# Altium PCB CANLink_V2.PcbDoc (part 3 of 3)
Units mm, origin at the board's own origin, x right, y up, seen from the top; angles counter-clockwise.
Board outline 75 x 56 mm, 2 copper layers (Top Layer, Bottom Layer); 205 components, 140 nets, 648 pads, 309 vias.
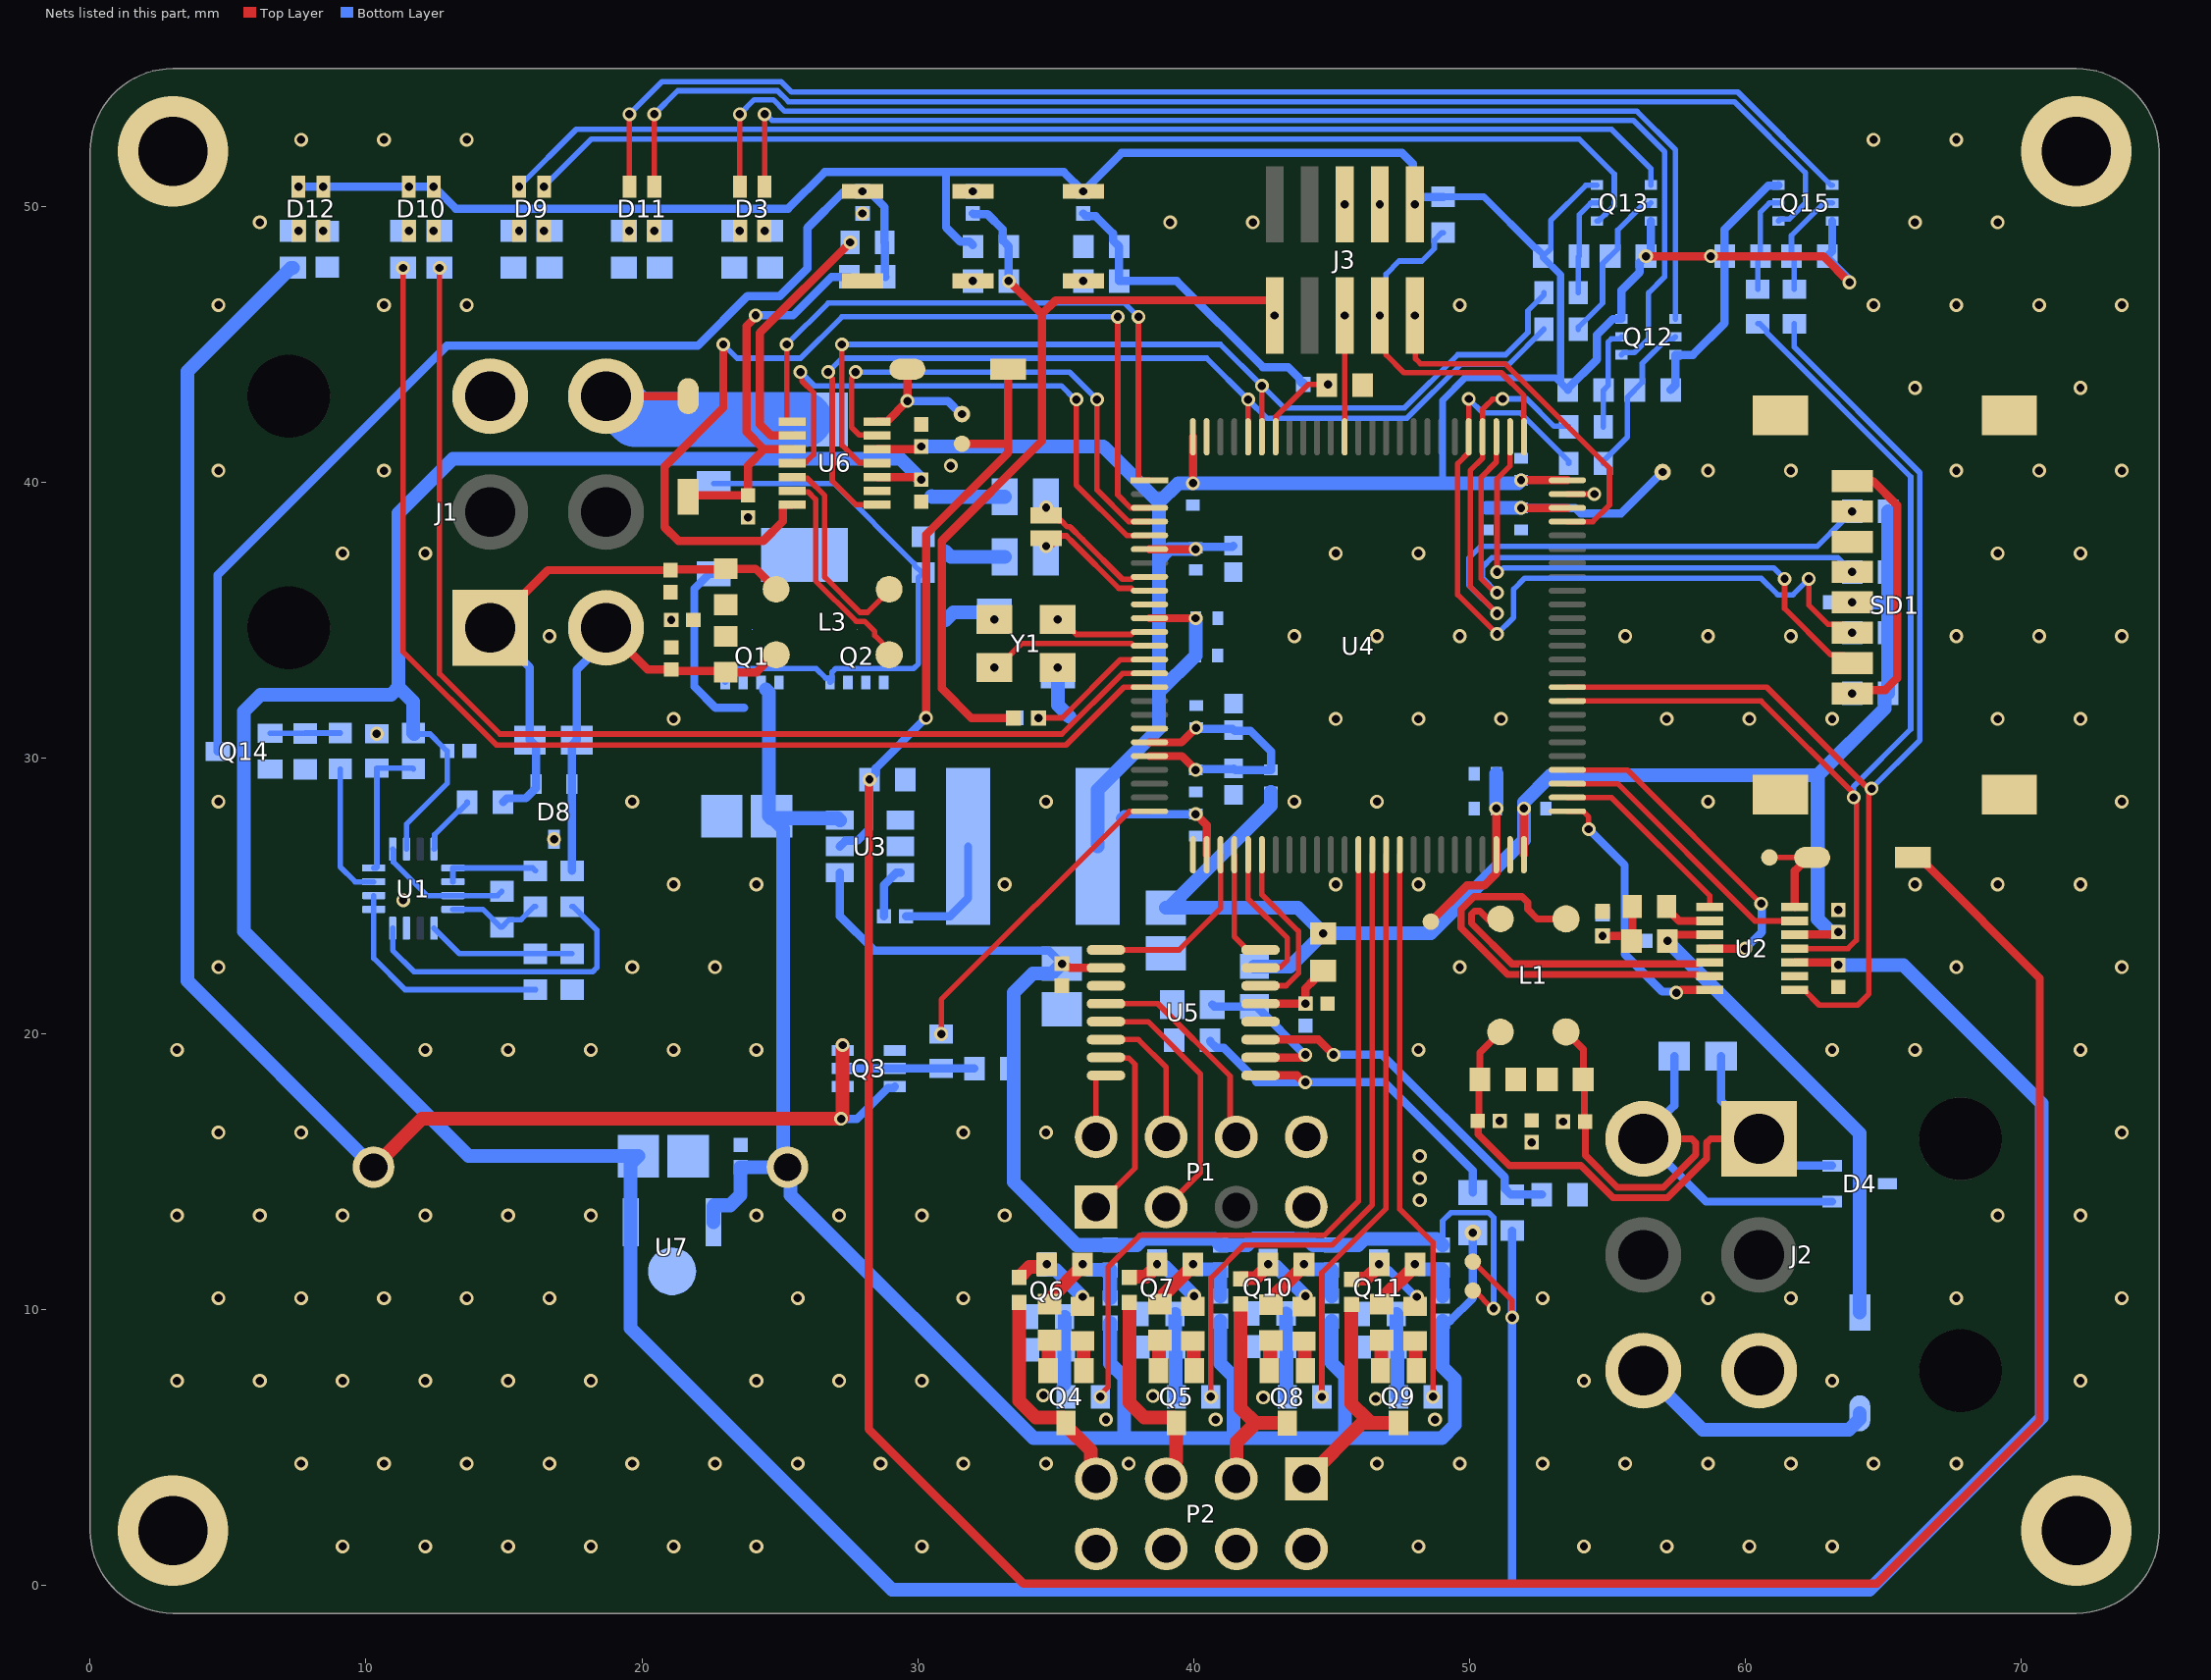
[diagram p2: the nets of this part, all layers, seen from the top]

## Via types
v1: diameter 0.5, hole 0.3, Top Layer to Bottom Layer, tented both sides, 305 vias
v2: diameter 4, hole 2.5, Top Layer to Bottom Layer, 4 vias

## Nets (pads, with @x,y where several pads share a name; then routed paths per layer and width w, separated by ;. In a path a pad name is that pad's centre, name@x,y a point inside that pad or via, vN(x,y) a via of type N, cw(c..) or ccw(c..) an arc to the next point about the centre after c; other vN are vias at no path point)
5V: C4.2 C19.2 C40.2 C48.1 R30.2 R88.2 TP5.1 U1.2 U2.3 U6.3 U7.1 | length 169.3
  Top Layer w0.2: TP5.1@50.125,11.75 51.55,10.325 v1(51.55,9.725)
  Top Layer w0.3: U6.3@28.533,40.196 28.535,40.193 30.032,40.193 v1(30.125,40.1) ; U2.3@61.793,22.6 61.796,22.598 63.277,22.598 v1(63.375,22.5)
  Bottom Layer w0.2: U1.2@11.465,26.705 11.465,27.61 12.94,29.085 C48.1@12.94,30.26 12.78,30.42 12.323,30.877 R88.2@11.748,30.877
  Bottom Layer w0.3: 51.55,-0.15 v1(51.55,9.725) R30.2@51.55,12.875
  Bottom Layer w0.5: R88.2@11.748,30.877 R88.2@11.715,30.91 11.7,30.925 11.7,32.05 11.175,32.575 ; v1(30.125,40.1) 29.375,40.85 13.15,40.85 11.175,38.875 11.175,32.575 ; v1(63.375,22.5) 65.725,22.5 70.75,17.475 70.75,6.1 64.5,-0.15 51.55,-0.15 29.075,-0.15 19.593,9.332 U7.1@19.593,13.176 19.593,15.293 C40.2@19.875,15.575 13.725,15.575 5.575,23.725 5.575,31.7 6.175,32.3 10.9,32.3 11.175,32.575
AN_IO_0: P1.6 U5.4 | length 7.9
  Top Layer w0.2: U5.4@36.825,21.1 38.7,21.1 41.325,18.475 41.325,16.49 P1.6@41.545,16.27
AN_IO_1: P1.3 U5.5 | length 9.5
  Top Layer w0.2: U5.5@36.825,20.45 38.35,20.45 40.25,18.55 40.25,14.975 P1.3@39.005,13.73
AN_IO_2: P1.4 U5.6 | length 5.1
  Top Layer w0.2: U5.6@36.825,19.8 38,19.8 39.005,18.795 P1.4@39.005,16.27
AN_IO_3: P1.1 U5.7 | length 6.9
  Top Layer w0.2: P1.1@36.465,13.73 37.875,15.14 37.875,18.9 37.654,19.121 36.854,19.121 U5.7@36.825,19.15
AN_IO_4: P1.2 U5.8 | length 2.5
  Top Layer w0.2: P1.2@36.465,16.27 36.465,18.431 36.534,18.5 U5.8@36.825,18.5
BOOT: C44.1 R22.2 R44.1 R47.2 | length 11.5
  Bottom Layer w0.3: C44.1@36,49.75 36.103,49.647 36.453,49.647 37.075,49.025 37.075,48.775 R47.2@37.3,48.55 R44.1@37.3,47.3 39.389,47.3 42.514,44.175 43.425,44.175 43.85,43.75 43.85,43.675 43.918,43.607 R22.2@43.993,43.607
BUZZ: R39.1 U4.25 | length 11.6
  Top Layer w0.2: v1(30.85,20) 30.85,21.25 37.673,28.073 38.397,28.073 U4.25@38.4,28.075
BUZZ_NEG: LS1.N Q3.3 Q3.6 R49.1 | length 59.8
  Top Layer w0.5: LS1.N@10.275,15.175 12.025,16.925 v1(27.225,16.925) 27.275,16.975 v1(27.275,19.6)
  Bottom Layer w0.3: v1(27.225,16.925) 27.8,16.925 28.925,18.05 29.125,18.05 Q3.3@29.175,18.1
  Bottom Layer w0.5: R49.1@7.35,47.775 7.275,47.775 3.525,44.025 3.525,21.925 LS1.N@10.275,15.175
CAN0_INH: D1.2 TP1.1 U6.7 | length 4.7
  Top Layer w0.3: U6.7@28.533,42.196 28.87,42.196 v1(29.625,42.952) D1.2@29.625,44.1
  Bottom Layer w0.3: v1(29.625,42.952) 31.087,42.952 31.563,42.475 v1(31.6,42.475)
CAN0_N: C18.1 D8.1 J1.1 L3.4 R26.1 R28.1 R90.1 | length 19.5
  Top Layer w0.3: J1.1@14.5,34.725 16.592,36.817 C18.1@21.04,36.817 21.065,36.842 23.015,36.842 R26.1@23.04,36.868 24.122,36.868 L3.4@24.865,36.125
  Bottom Layer w0.3: J1.1@14.5,34.725 15.94,33.285 R28.1@15.94,30.66 16.165,30.435 D8.1@16.165,29.06 16.165,28.92 15.79,28.545 15.1,28.545 R90.1@14.965,28.41
CAN0_P: C39.2 D8.2 J1.4 L3.1 R28.2 R29.2 R40.1 | length 16.4
  Top Layer w0.3: J1.4@18.7,34.725 20.208,33.217 C39.2@21.065,33.217 21.115,33.166 22.99,33.166 R29.2@23.04,33.116 24.163,33.116 24.797,33.75 L3.1@24.865,33.75
  Bottom Layer w0.3: R40.1@17.465,25.92 D8.2@17.465,29.06 17.465,30.485 R28.2@17.64,30.66 17.64,33.204 18.7,34.264 J1.4@18.7,34.725
CAN0_RX: R36.1 U4.95 U6.4 | length 35.7
  Top Layer w0.2: v1(27.25,45) 27.25,41.35 27.886,40.714 28.515,40.714 U6.4@28.533,40.696 ; U4.95@42.475,41.65 v1(42.475,43.5)
  Bottom Layer w0.2: v1(27.25,45) 40.975,45 v1@42.461,43.514 ; v1(42.475,43.5) 43.275,42.7 47.65,42.7 49.575,44.625 51.313,44.625 52.123,45.435 52.123,46.223 52.7,46.8 R36.1@52.7,46.875
CAN0_TX: R86.1 U4.96 U6.1 | length 35.8
  Top Layer w0.2: v1@26.75,44.038 v1(26.75,44) 26.75,43.919 26.9,43.769 26.9,40.05 27.754,39.196 U6.1@28.533,39.196 ; U4.96@41.975,41.65 v1(41.975,43)
  Bottom Layer w0.2: v1(26.75,44) 27.25,44.5 40.475,44.5 v1(41.975,43) 42.65,42.325 47.738,42.325 49.688,44.275 51.425,44.275 R86.1@52.7,45.55
CAN0_V_SUP: D7.2 F1.1 J1.6 | length 10.5
  Top Layer w0.3: J1.6@18.7,43.125 D7.2@21.675,43.125
  Bottom Layer w2: J1.6@18.7,43.125 18.903,43.125 19.746,42.282 F1.1@25.894,42.282
CAN1_N: C3.1 D4.2 J2.1 L1.4 R9.1 R11.1 | length 23
  Top Layer w0.254: L1.4@51.125,20.075 50.374,19.324 R9.1@50.374,18.35 50.337,18.313 50.337,16.887 C3.1@50.3,16.85 50.317,16.833 50.317,16.358 51.445,15.23 54.039,15.23 55.206,14.063 57.185,14.063 58.591,15.468 58.591,16.051 58.739,16.2 J2.1@60.5,16.2
  Bottom Layer w0.3: R11.1@59.125,19.2 59.125,17.575 61.475,15.225 D4.2@63.15,15.225
CAN1_P: C9.2 D4.1 J2.4 L1.1 R11.2 R13.2 | length 23.4
  Top Layer w0.254: L1.1@53.5,20.075 54.126,19.449 R13.2@54.126,18.35 54.163,18.313 54.163,16.862 C9.2@54.2,16.825 54.2,15.608 55.364,14.444 57.027,14.444 58.21,15.626 58.21,16.051 58.061,16.2 J2.4@56.3,16.2
  Bottom Layer w0.3: R11.2@57.425,19.2 57.425,17.407 56.3,16.282 J2.4@56.3,16.2 58.575,13.925 D4.1@63.15,13.925
CAN1_RX: R94.1 U2.4 U4.59 | length 39.9
  Top Layer w0.2: U4.59@53.55,32.075 53.553,32.073 60.577,32.073 64.025,28.625 64.025,23.4 63.725,23.1 U2.4@61.793,23.1
  Bottom Layer w0.2: R94.1@60.45,45.75 60.525,45.75 60.775,45.5 60.775,45.425 65.998,40.202 65.998,31.048 63.925,28.975 v1(63.925,28.575)
CAN1_TX: R97.1 U2.1 U4.60 | length 42.4
  Top Layer w0.2: U4.60@53.55,32.575 60.775,32.575 64.475,28.875 64.475,21.45 64.075,21.05 62.68,21.05 62.13,21.6 U2.1@61.793,21.6
  Bottom Layer w0.2: R97.1@61.775,45.75 61.775,44.9 66.325,40.35 66.325,30.65 v1(64.575,28.9)
CAN_H_BUF: R43.1 U1.13 U1.14 | length 8.6
  Bottom Layer w0.2: U1.14@10.28,25.02 U1.13@10.28,24.52 10.28,22.745 11.415,21.61 R43.1@16.14,21.61
CAN_INH: D2.2 TP7.1 U2.7 | length 3.4
  Top Layer w0.2: TP7.1@60.875,26.4 D2.2@62.277,26.4
  Top Layer w0.3: U2.7@61.793,24.6 61.793,25.916 D2.2@62.277,26.4
CAN_L_BUF: R42.1 U1.5 U1.6 | length 3.5
  Bottom Layer w0.2: U1.6@13.15,25.52 U1.5@13.15,26.02 16.04,26.02 R42.1@16.14,25.92
CAN_MISO: U2.6 U4.53 | length 10.3
  Top Layer w0.2: U4.53@53.55,29.075 55.375,29.075 60.35,24.1 U2.6@61.793,24.1
CAN_MOSI: U2.11 U4.54 | length 12.2
  Top Layer w0.2: U4.54@53.55,29.575 55.725,29.575 v1(60.575,24.725)
  Top Layer w0.3: U2.11@58.707,23.1 v1(60,23.1)
  Bottom Layer w0.3: v1(60,23.1) 60.6,23.7 60.6,24.7 v1(60.575,24.725)
CAN_nCS: U2.14 U4.51 | length 10.1
  Top Layer w0.2: U4.51@53.55,28.075 54.118,28.075 54.128,28.065 54.324,27.869 v1@54.324,27.426
  Top Layer w0.3: v1(57.5,21.5) 57.581,21.5 57.681,21.6 U2.14@58.707,21.6
  Bottom Layer w0.3: v1(54.325,27.425) 55.625,26.125 55.625,22.9 56.987,21.538 57.462,21.538 v1(57.5,21.5)
CAN_PWR: D5.2 J2.6 | length 9.1
  Bottom Layer w0.5: J2.6@56.3,7.8 58.45,5.65 63.752,5.65 64.15,6.048 D5.2@64.15,6.25
CAN_SCLK: U2.8 U4.52 | length 7
  Top Layer w0.2: U4.52@53.55,28.575 55.15,28.575 58.707,25.018 U2.8@58.707,24.6
DIFF_AMP_OUT: R34.2 U1.1 U1.7 | length 5
  Bottom Layer w0.2: U1.1@10.965,26.705 10.995,26.675 10.995,26.23 12.205,25.02 U1.7@13.15,25.02 14.77,25.02 R34.2@14.925,25.175
G_LED: R38.1 U4.15 | length 42.3
  Top Layer w0.2: v1(12.664,47.775) 12.664,33.061 14.85,30.875 35.225,30.875 37.425,33.075 U4.15@38.4,33.075
GND: C1.2 C2.1 C3.2 C4.1 C5.1 C6.1 C7.2 C8.1 C9.1 C11.1 C12.2 C13.2 C14.2 C15.2 C16.2 C17.2 C18.2 C19.1 C20.1 C21.1 C22.2 C23.1 C24.1 C25.2 C26.1 C27.1 C28.1 C29.2 C30.1 C31.1 C32.1 C33.1 C34.1 C35.2 C36.1 C37.2 C38.1 C39.1 C40.1 C41.1 C42.1 C43.1 C45.2 C46.2 C47.2 C48.2 D4.3 D8.3 J1.3 J2.3 J3.3 J3.5 P1.7 P1.8 P2.2 P2.4 P2.6 P2.8 Q3.1 Q3.4 Q6.2 Q7.2 Q10.2 Q11.2 Q14.2 R8.1 R14.1 R15.2 R18.2 R19.1 R20.2 R23.1 R31.2 R33.1 R46.2 R47.1 R64.1 R65.1 R80.1 R81.1 R83.2 R85.1 R87.1 R89.1 R92.1 R96.1 R98.1 SD1.6 SD1.9 SD1.10 SD1.11 SD1.12 SW1.1 SW3.2 U1.11 U2.2 U3.4 U4.10 U4.19 U4.26 U4.49 U4.74 U4.99 U5.3 U5.12 U6.2 U7.2 Y1.2 Y1.4 | length 9.8
  Top Layer w0.2: U4.74@53.55,39.575 v1@54.525,39.575
  Bottom Layer w0.5: 30.5,39.5 30.522,39.478 C46.2@33.15,39.478 ; 31,35 31.287,35.287 32.525,35.287 v1(32.775,35.037) ; 31,37.5 31.197,37.303 C47.2@33.15,37.303 ; v1(35.075,33.287) C42.1@35.075,33.036 35.075,31.925 35.5,31.5
  other v1: 9.15,1.425 12.15,1.425 15.15,1.425 18.15,1.425 21.15,1.425 24.15,1.425 30.15,1.425 48.15,1.425 54.15,1.425 57.15,1.425 60.15,1.425 63.15,1.425 7.65,4.425 10.65,4.425 13.65,4.425 16.65,4.425 19.65,4.425 22.65,4.425 25.65,4.425 28.65,4.425 31.65,4.425 34.65,4.425 37.65,4.425 46.65,4.425 49.65,4.425 52.65,4.425 55.65,4.425 58.65,4.425 61.65,4.425 64.65,4.425 67.65,4.425 36.825,6.025 40.8,6.025 48.75,6.025 46.6,6.775 42.525,6.825 38.525,6.875 34.55,6.9 3.15,7.425 6.15,7.425 9.15,7.425 12.15,7.425 15.15,7.425 18.15,7.425 24.15,7.425 27.15,7.425 30.15,7.425 54.15,7.425 63.15,7.425 72.15,7.425 4.65,10.425 7.65,10.425 10.65,10.425 13.65,10.425 16.65,10.425 25.65,10.425 31.65,10.425 52.65,10.425 58.65,10.425 61.65,10.425 67.65,10.425 73.65,10.425 3.15,13.425 6.15,13.425 9.15,13.425 12.15,13.425 15.15,13.425 18.15,13.425 24.15,13.425 27.15,13.425 30.15,13.425 33.15,13.425 69.15,13.425 72.15,13.425 48.2,13.975 48.2,14.775 48.2,15.575 52.25,16.075 4.65,16.425 7.65,16.425 31.65,16.425 34.65,16.425 73.65,16.425 53.4,16.825 51.1,16.85 3.15,19.425 12.15,19.425 15.15,19.425 18.15,19.425 21.15,19.425 24.15,19.425 48.15,19.425 63.15,19.425 66.15,19.425 72.15,19.425 4.65,22.425 19.65,22.425 22.65,22.425 49.65,22.425 67.65,22.425 73.65,22.425 63.375,24.5 11.35,24.85 21.15,25.425 24.15,25.425 33.15,25.425 45.15,25.425 48.15,25.425 66.15,25.425 69.15,25.425 72.15,25.425 16.815,27.06 4.65,28.425 19.65,28.425 34.65,28.425 43.65,28.425 46.65,28.425 58.65,28.425 73.65,28.425 10.39,30.885 21.15,31.425 45.15,31.425 48.15,31.425 51.15,31.425 57.15,31.425 60.15,31.425 63.15,31.425 69.15,31.425 72.15,31.425 16.65,34.425 43.65,34.425 46.65,34.425 49.65,34.425 55.65,34.425 58.65,34.425 61.65,34.425 67.65,34.425 70.65,34.425 73.65,34.425 21.065,35.017 9.15,37.425 12.15,37.425 45.15,37.425 48.15,37.425 69.15,37.425 72.15,37.425 23.85,38.725 54.525,39.575 4.65,40.425 10.65,40.425 58.65,40.425 61.65,40.425 67.65,40.425 70.65,40.425 73.65,40.425 31.2,40.6 66.15,43.425 72.15,43.425 4.65,46.425 10.65,46.425 13.65,46.425 49.65,46.425 64.65,46.425 67.65,46.425 70.65,46.425 73.65,46.425 6.15,49.425 39.15,49.425 42.15,49.425 66.15,49.425 69.15,49.425 28,49.75 45.48,50.08 46.75,50.08 32,50.55 7.65,52.425 10.65,52.425 13.65,52.425 64.65,52.425 67.65,52.425
  other v2: 3,2 72,2 3,52 72,52
INT_3V3: C1.1 C2.2 C5.2 C12.1 C13.1 C15.1 C20.2 C22.1 C24.2 C26.2 C27.2 C28.2 C35.1 C36.2 C44.2 D10.2 D10.3 D12.2 D12.3 FB1.1 J3.1 L2.2 Q12.3 Q12.6 Q13.3 Q13.6 Q15.3 Q15.6 R1.2 R2.2 R3.2 R4.2 R5.2 R7.2 R17.2 R24.1 R35.2 R37.2 R48.1 R52.1 R53.1 R68.1 R69.1 R82.1 R84.2 R93.2 R95.2 SD1.4 SW2.2 TP4.1 U2.5 U3.1 U4.6 U4.11 U4.27 U4.50 U4.75 U4.100 U5.2 U6.5 | length 253.8
  Top Layer w0.2: TP4.1@50.125,10.7 50.177,10.7 50.825,10.052 v1(50.877,10.052)
  Top Layer w0.3: U6.5@28.533,41.196 28.535,41.198 30.023,41.198 v1(30.125,41.3) ; v1(35.225,22.55) 35.335,22.44 35.471,22.44 35.511,22.4 U5.2@36.825,22.4 ; U4.11@38.4,35.075 v1(40.077,35.075) ; U4.6@38.4,37.575 v1(40.077,37.575) ; v1(39.975,39.973) U4.100@39.975,41.65 ; v1(40.075,27.975) 40.475,27.575 U4.27@40.475,26.5 ; v1(51.873,40.075) U4.75@53.55,40.075 ; U4.50@51.975,26.5 v1(51.975,28.177) ; v1(56.4,48.2) v1(58.75,48.2) 62.825,48.2 v1(63.775,47.25) ; U2.5@61.793,23.6 61.796,23.603 63.278,23.603 v1(63.375,23.7)
  Bottom Layer w0.2: R69.1@49.025,12.35 49.025,13.225 49.325,13.525 50.7,13.525 50.877,13.348 v1(50.877,10.052) v1@50.875,10.05 ; R35.2@52.675,48.2 52.95,48.475 52.95,49.5 54.217,50.767 54.617,50.767 Q13.3@54.625,50.775
  Bottom Layer w0.254: 49.025,39.973 49.025,42.975 49.846,43.796 53.12,43.796 53.269,43.648 R4.2@53.318,43.648 ; R82.1@49.05,50.35 50.525,50.35 52.377,48.498 52.427,48.498 52.675,48.25 R35.2@52.675,48.2 52.675,48.15 53.304,47.521 53.304,43.611 R4.2@53.566,43.35
  Bottom Layer w0.3: v1(7.55,50.725) v1(8.45,50.725) v1(12.45,50.725) 13.25,49.925 25.3,49.925 26.625,51.25 31.025,51.25 ; U3.1@27.175,25.85 27.175,24.275 28.423,23.027 34.748,23.027 v1(35.225,22.55) ; R48.1@32,48.6 31.875,48.725 31.543,48.725 31.025,49.243 31.025,51.25 ; 37.325,27.829 37.471,27.975 v1(40.075,27.975) ; v1(40.077,37.575) 40.167,37.665 41.401,37.665 C35.1@41.441,37.704 ; J3.1@47.945,51.14 47.945,51.555 47.558,51.942 37.392,51.942 v1(36,50.55) 35.3,51.25 31.025,51.25 ; v1(48.02,50.08) 48.02,50.275 48.095,50.35 R82.1@49.05,50.35 ; R4.2@53.566,43.35 53.566,43.4 54.625,44.459 54.625,45.35 55.2,45.925 Q12.3@55.516,45.925 55.516,46.966 56.175,47.625 56.175,47.975 56.575,48.375 Q13.6@56.575,49.475 ; R7.2@57.291,43.35 57.466,43.525 Q12.6@57.466,44.625 58.1,44.625 59.25,45.775 R93.2@59.25,48.2 59.25,49.175 60.825,50.75 61.175,50.75 Q15.3@61.2,50.775 ; Q15.6@63.15,49.475 63.15,48.375 R95.2@62.975,48.2 62.975,48.15 63.737,47.388 63.737,47.288 v1(63.775,47.25)
  Bottom Layer w0.5: v1(30.125,41.3) 36.725,41.3 38.75,39.275 ; v1(35.225,22.55) 34.867,22.192 34.167,22.192 33.475,21.5 33.475,14.637 35.762,12.35 R52.1@36.975,12.35 37.942,12.35 38.169,12.577 40.748,12.577 R53.1@40.975,12.35 41.947,12.35 42.194,12.596 43.589,12.596 43.608,12.578 44.111,12.578 44.339,12.35 R68.1@45,12.35 45.967,12.35 46.194,12.577 48.798,12.577 R69.1@49.025,12.35 ; L2.2@36.525,26.8 36.525,28.85 38.75,31.075 38.75,32.4 ; C13.1@39,24.576 C13.1@39.101,24.576 ; C22.1@40.075,33.725 38.75,32.4 ; C22.1@40.075,33.725 v1(40.077,35.075) ; v1(40.077,37.575) 39.125,37.575 38.75,37.2 ; R17.2@42.2,22.45 43.5,22.45 v1(44.7,23.65) ; FB1.1@42.802,28.775 42.802,28.277 C13.1@39.101,24.576 ; v1(51.873,40.075) 51.771,39.973 49.025,39.973 v1(39.975,39.973) 39.448,39.973 38.75,39.275 ; v1(63.375,23.7) 63.1,23.7 62.625,24.175 62.625,29.375 ; v1(63.875,35.648) 65.175,35.648 ; R3.2@65.175,38.948 R1.2@65.175,36.748 65.175,35.648 ; 38.75,32.4 38.75,37.2 ; 38.75,37.2 38.75,39.275 ; C13.1@39.101,24.576 43.774,24.576 v1(44.7,23.65) ; v1(44.7,23.65) 48.596,23.65 51.975,27.029 51.975,28.402 52.948,29.375 62.625,29.375 ; 62.625,29.375 65.05,31.8 65.05,32.223 R5.2@65.175,32.348 R2.2@65.175,34.548 65.175,35.648
  other v1: 11.55,50.725
INT_3V3_SENSE: R17.1 R19.2 U5.10 | length 5.8
  Top Layer w0.3: U5.10@42.425,19.15 43.896,19.15 43.996,19.25 v1(44.05,19.25)
  Bottom Layer w0.3: R19.2@40.675,21.075 40.75,21 42.275,21 v1@44.025,19.25
INT_5V_SENSE: R30.1 R31.1 U5.11 | length 12.8
  Top Layer w0.3: U5.11@42.425,19.8 44.525,19.8 v1(45.075,19.25)
  Bottom Layer w0.3: v1(45.075,19.25) 46.832,19.25 51.275,14.807 51.275,14.4 51.5,14.175 R31.1@52.625,14.175
MOS_SUP_0: R50.2 R52.2 R58.2 R62.1 | length 4
  Top Layer w0.5: R62.1@34.775,10.2 34.825,10.2 34.95,10.325 34.95,10.567 35.833,11.45 35.85,11.45 R58.2@35.975,11.575
  Bottom Layer w0.5: v1(35.975,11.65) 36.175,11.45 R52.2@36.975,11.45 ; R52.2@36.95,11.4 36.975,11.375 R50.2@36.975,10.425
MOS_SUP_1: R51.2 R53.2 R59.2 R63.1 | length 4
  Top Layer w0.5: R63.1@38.775,10.2 38.825,10.2 38.95,10.325 38.95,10.575 39.85,11.475 39.85,11.525 v1(39.975,11.65)
  Bottom Layer w0.5: v1(39.975,11.65) 40.15,11.475 40.95,11.475 R53.2@40.975,11.45 R51.2@40.975,10.5
MOS_SUP_2: R66.2 R68.2 R74.2 R78.1 | length 4
  Top Layer w0.5: R78.1@42.8,10.194 42.85,10.194 42.975,10.319 42.975,10.575 43.875,11.475 43.875,11.525 v1(44,11.65)
  Bottom Layer w0.5: v1(44,11.65) 44.175,11.475 44.975,11.475 R68.2@45,11.45 R66.2@45,10.5
MOS_SUP_3: R67.2 R69.2 R75.2 R79.1 | length 4
  Top Layer w0.5: R79.1@46.825,10.2 46.875,10.2 47,10.325 47,10.575 47.9,11.475 47.9,11.525 v1(48.025,11.65)
  Bottom Layer w0.5: v1(48.025,11.65) 48.2,11.475 49,11.475 R69.2@49.025,11.45 R67.2@49.025,10.5
NetC6_2: C6.2 D5.1 R10.1 U2.10 | length 18
  Top Layer w0.3: v1(57.175,23.375) 57.4,23.6 U2.10@58.707,23.6
  Bottom Layer w0.5: v1(57.175,23.375) 64.15,16.4 D5.1@64.15,9.9
NetC7_1: C7.1 R9.2 R13.1
NetC8_2: C8.2 R10.2 R12.2 R14.2 | length 2.1
  Top Layer w0.254: R12.2@55.888,24.613 R12.2@55.9,24.625
  Top Layer w0.3: v1(54.825,23.55) 55.8,23.55 55.9,23.65 R12.2@55.9,24.625
NetC10_1: C10.1 U3.6 | length 1.9
  Bottom Layer w0.3: C10.1@28.775,24.275 28.775,25.401 29.224,25.85 U3.6@29.374,25.85
NetC10_2: C10.2 L2.1 U3.5 | length 4.4
  Bottom Layer w0.3: C10.2@29.575,24.275 31.175,24.275 31.825,24.925 L2.1@31.825,26.8
NetC14_1: C14.1 R21.1 U4.14 | length 4.9
  Top Layer w0.2: v1(34.375,31.462) 35.237,31.462 37.35,33.575 U4.14@38.4,33.575
NetC16_1: C16.1 C17.1 R24.2 U5.13 | length 3.1
  Top Layer w0.3: U5.13@42.425,21.1 v1(44.05,21.1) 44.05,21.65 44.375,21.975 44.375,22.05 44.625,22.3 R24.2@44.7,22.3
NetC21_2: C21.2 D7.1 R25.1 U6.10 | length 14.4
  Top Layer w0.3: D7.1@21.675,39.475 21.725,39.525 C21.2@23.85,39.525 23.85,40.617 24.429,41.196 ; v1(24.124,46.051) 24.124,45.997 23.8,45.674 23.8,41.825 24.429,41.196 ; U6.10@25.447,41.196 24.429,41.196
  Bottom Layer w0.3: v1(24.124,46.051) 25.476,46.051 26.875,47.45 R25.1@27.525,47.45
NetC25_1: C25.1 R26.2 R29.1
NetC31_2: C31.2 C32.2 TP3.1 U4.48 | length 6.7
  Top Layer w0.3: TP3.1@48.6,24.075 49.908,25.383 50.532,25.383 50.975,25.826 U4.48@50.975,26.5 v1(50.975,28.177)
  Bottom Layer w0.5: v1(50.975,28.177) C31.2@50.975,29.434
NetC33_2: C33.2 C34.2 TP8.1 U4.73 | length 8.7
  Top Layer w0.3: v1(51.873,39.075) U4.73@53.55,39.075
  Bottom Layer w0.3: v1(51.873,39.075) 53.828,39.075 54.028,38.875 55.5,38.875 v1(57,40.375)
  Bottom Layer w0.5: C33.2@50.634,39.074 v1(51.873,39.075)
NetD3_1: D3.1 R8.2
  other v1: 24.45,49.125
NetD3_2: D3.2 Q12.1 | length 44
  Top Layer w0.2: D3.2@24.45,50.725 v1(24.45,53.35)
  Bottom Layer w0.2: v1(24.45,53.35) 24.493,53.35 24.717,53.126 55.937,53.126 57.075,51.988 57.075,47.45 56.491,46.866 56.491,45.216 55.975,44.7 55.591,44.7 Q12.1@55.516,44.625
NetD3_3: D3.3 Q12.4 | length 43.6
  Top Layer w0.2: D3.3@23.55,50.725 v1(23.55,53.35)
  Bottom Layer w0.2: v1(23.55,53.35) 24.071,53.871 24.761,53.871 25.178,53.454 56.071,53.454 57.466,52.059 Q12.4@57.466,45.925
NetD3_4: D3.4 R33.2
  other v1: 23.55,49.125
NetD9_1: D9.1 R85.2
  other v1: 16.45,49.125
NetD9_2: D9.2 Q13.1 | length 42
  Bottom Layer w0.2: v1(16.45,50.725) 18.175,52.45 53.975,52.45 55.25,51.175 55.25,50.029 54.936,49.715 54.915,49.715 54.675,49.475 Q13.1@54.625,49.475
NetD9_3: D9.3 Q13.4 | length 43.1
  Bottom Layer w0.2: v1(15.55,50.725) 17.624,52.799 24.242,52.799 24.243,52.798 24.657,52.798 24.658,52.799 53.939,52.799 53.94,52.798 55.152,52.798 56.575,51.375 Q13.4@56.575,50.775
NetD9_4: D9.4 R87.2
  other v1: 15.55,49.125
NetD10_1: D10.1 R38.2
  other v1: 12.45,49.125
NetD10_4: D10.4 R41.2
  other v1: 11.55,49.125
NetD11_1: D11.1 R96.2
  other v1: 20.45,49.125
NetD11_2: D11.2 Q15.1 | length 48.3
  Top Layer w0.2: D11.2@20.45,50.725 v1(20.45,53.35)
  Bottom Layer w0.2: v1(20.45,53.35) 21.298,54.198 24.915,54.198 25.313,53.8 59.6,53.8 62.175,51.225 62.175,50.125 61.6,49.55 61.275,49.55 Q15.1@61.2,49.475
NetD11_3: D11.3 Q15.4 | length 48.3
  Top Layer w0.2: D11.3@19.55,50.725 v1(19.55,53.35)
  Bottom Layer w0.2: v1(19.55,53.35) 20.725,54.525 25.05,54.525 25.425,54.15 59.725,54.15 63.1,50.775 Q15.4@63.15,50.775
NetD11_4: D11.4 R98.2
  other v1: 19.55,49.125
NetD12_1: D12.1 R46.1
  other v1: 8.45,49.125
NetD12_4: D12.4 R49.2
  other v1: 7.55,49.125
NetF1_2: F1.2 Q1.5-6-7-8 Q2.5-6-7-8
NetQ3_2: Q3.2 Q3.5 R37.1 R39.2 | length 4.8
  Bottom Layer w0.3: Q3.5@27.275,18.75 Q3.2@29.175,18.75 R39.2@30.85,18.75 R37.1@32.05,18.75
NetQ4_1: Q4.1 R56.2 | length 1.1
  Top Layer w0.5: R56.2@35.975,8.875 36,8.85 36,7.825 Q4.1@36.025,7.8
NetQ4_2: Q4.2 R62.2 | length 1.1
  Top Layer w0.5: Q4.2@34.725,7.8 34.75,7.825 34.75,8.875 R62.2@34.775,8.9
NetQ5_1: Q5.1 R57.2 | length 1.1
  Top Layer w0.5: R57.2@39.975,8.875 40,8.85 40,7.825 Q5.1@40.025,7.8
NetQ5_2: Q5.2 R63.2 | length 1.1
  Top Layer w0.5: Q5.2@38.725,7.8 38.75,7.825 38.75,8.875 R63.2@38.775,8.9
NetQ6_1: Q6.1 R60.2 R64.2 | length 2.5
  Bottom Layer w0.5: 35.3,7.3 35.312,7.312 35.312,8.538 R64.2@35.325,8.55 Q6.1@35.325,9.75
NetQ6_3: Q6.3 R54.1 R56.1 R58.1 | length 3
  Top Layer w0.5: R54.1@33.675,11.175 34.055,11.555 34.58,11.555 v1(34.675,11.65)
  Bottom Layer w0.5: v1(34.675,11.65) 34.675,11.55 34.775,11.45 35,11.45 v1(35.975,10.475)
NetQ7_1: Q7.1 R61.2 R65.2 | length 3
  Bottom Layer w0.5: R65.2@39.325,8.65 39.35,8.625 39.35,6.875 R61.2@39.375,6.85 ; R65.2@39.325,8.65 Q7.1@39.325,9.85
NetQ7_3: Q7.3 R55.1 R57.1 R59.1 | length 3.1
  Top Layer w0.5: R55.1@37.675,11.175 37.7,11.2 38.275,11.2 38.675,11.6 v1(38.675,11.65)
  Bottom Layer w0.5: Q7.3@38.675,11.75 v1(38.675,11.65) 38.775,11.55 38.972,11.55 v1(40.021,10.502)
NetQ8_1: Q8.1 R72.2 | length 1.1
  Top Layer w0.5: R72.2@44,8.869 44.025,8.844 44.025,7.819 Q8.1@44.05,7.794
NetQ8_2: Q8.2 R78.2 | length 1.1
  Top Layer w0.5: Q8.2@42.75,7.794 42.775,7.819 42.775,8.869 R78.2@42.8,8.894
NetQ9_1: Q9.1 R73.2 | length 1.1
  Top Layer w0.5: R73.2@48.025,8.875 48.05,8.85 48.05,7.825 Q9.1@48.075,7.8
NetQ9_2: Q9.2 R79.2 | length 1.1
  Top Layer w0.5: Q9.2@46.775,7.8 46.8,7.825 46.8,8.875 R79.2@46.825,8.9
NetQ10_1: Q10.1 R76.2 R80.2 | length 3
  Bottom Layer w0.5: Q10.1@43.35,9.869 R80.2@43.35,8.669 43.375,8.644 43.375,6.869 R76.2@43.4,6.844
NetQ10_3: Q10.3 R70.1 R72.1 R74.1 | length 3.2
  Top Layer w0.5: R70.1@41.7,11.119 41.725,11.144 42.244,11.144 42.7,11.6 v1(42.7,11.65)
  Bottom Layer w0.5: Q10.3@42.7,11.769 v1(42.7,11.65) 42.781,11.569 42.987,11.569 43.694,10.862 v1(44.058,10.498)
NetQ11_1: Q11.1 R77.2 R81.2 | length 3
  Bottom Layer w0.5: Q11.1@47.35,9.85 R81.2@47.35,8.65 47.387,8.612 47.387,6.888 R77.2@47.425,6.85
NetQ11_3: Q11.3 R71.1 R73.1 R75.1 | length 3.2
  Top Layer w0.5: R71.1@45.725,11.1 45.75,11.125 46.25,11.125 46.725,11.6 v1(46.725,11.65)
  Bottom Layer w0.3: v1(48.1,10.475) 48.062,10.513 48.008,10.513 47.071,11.45 46.9,11.45 Q11.3@46.725,11.625 ; Q11.3@46.725,11.625 v1(46.725,11.65) Q11.3@46.725,11.625
NetQ12_2: Q12.2 R4.1 R6.2 | length 3.7
  Bottom Layer w0.2: R6.2@54.85,42.013 54.85,43.334 55.025,43.509 55.025,45.082 55.142,45.2 55.441,45.2 Q12.2@55.516,45.275
NetQ12_5: Q12.5 R7.1 R32.2 | length 5.8
  Bottom Layer w0.2: R32.2@54.85,40.688 54.85,40.763 55.725,41.638 55.725,43.084 56.266,43.625 56.266,44.316 57.15,45.2 57.391,45.2 Q12.5@57.466,45.275
NetQ13_2: Q13.2 R35.1 R36.2 | length 3.7
  Bottom Layer w0.2: R36.2@53.95,46.875 53.95,48.175 R35.1@53.975,48.2 53.975,49.7 54.4,50.125 Q13.2@54.625,50.125
NetQ13_5: Q13.5 R84.1 R86.2 | length 5.8
  Bottom Layer w0.2: R86.2@53.95,45.55 53.95,45.625 54.825,46.5 54.825,47.925 55.375,48.475 55.375,49.15 56.275,50.05 56.5,50.05 Q13.5@56.575,50.125
NetQ14_1: Q14.1 R91.1 R92.2 | length 2.5
  Bottom Layer w0.2: Q14.1@6.525,30.9 R92.2@7.8,30.9 7.81,30.91 R91.1@9.065,30.91
NetQ15_2: Q15.2 R93.1 R94.2 | length 3.6
  Bottom Layer w0.2: R94.2@60.45,47 60.45,48.1 R93.1@60.55,48.2 60.55,49.8 60.875,50.125 Q15.2@61.2,50.125
NetQ15_5: Q15.5 R95.1 R97.2 | length 4
  Bottom Layer w0.2: R97.2@61.775,47 61.775,48.1 R95.1@61.675,48.2 61.675,48.95 62.85,50.125 Q15.5@63.15,50.125
NetR12_1: R12.1 U2.9 | length 1.8
  Top Layer w0.3: R12.1@57.15,24.625 57.15,24.55 57.6,24.1 U2.9@58.707,24.1
NetR22_1: R22.1 R23.2 U4.94 | length 3.1
  Top Layer w0.2: U4.94@42.975,41.65 42.977,41.653 42.977,42.377 44.15,43.55 v1(44.875,43.55)
NetR27_1: R27.1 U6.9 | length 9.3
  Top Layer w0.3: U6.9@25.447,41.696 25.445,41.699 24.676,41.699 24.275,42.1 24.275,45.425 v1(27.55,48.7)
NetR34_1: R34.1 R42.2 U1.8 | length 3.6
  Bottom Layer w0.2: U1.8@13.15,24.52 14.23,24.52 14.875,23.875 R34.1@14.925,23.875 15.2,24.15 15.62,24.15 16.09,24.62 R42.2@16.14,24.62
NetR40_2: R40.2 U1.12 | length 11.2
  Bottom Layer w0.2: U1.12@10.965,23.835 10.965,23.035 11.74,22.26 18.215,22.26 18.365,22.41 18.365,23.77 17.515,24.62 R40.2@17.465,24.62
NetR43_2: R43.2 R83.1 U1.9 | length 5.4
  Bottom Layer w0.2: U1.9@12.465,23.835 13.39,22.91 R43.2@16.14,22.91 R83.1@17.465,22.91
NetR44_2: R44.2 SW2.1
  other v1: 36,47.3
NetR45_2: R45.2 SW3.1
  other v1: 32,47.3
NetR88_1: R88.1 R89.2 U1.16 | length 5
  Bottom Layer w0.2: U1.16@10.28,26.02 10.36,26.02 10.39,26.05 R89.2@10.39,29.635 11.69,29.635 R88.1@11.715,29.61
NetR90_2: R90.2 U1.4 | length 2.2
  Bottom Layer w0.2: U1.4@12.465,26.705 12.49,26.73 12.49,27.235 13.34,28.085 13.39,28.085 13.665,28.36 R90.2@13.665,28.41
NetR91_2: R91.2 U1.15 | length 5
  Bottom Layer w0.2: R91.2@9.065,29.61 9.065,26.06 9.605,25.52 U1.15@10.28,25.52
nWAKE: C23.2 Q14.3 R25.2 R27.2 SW1.2 | length 40
  Bottom Layer w0.3: Q14.3@4.625,30.25 4.625,36.65 12.925,44.95 22.025,44.95 23.825,46.75 25,46.75 26,47.75 26,49.225 27.325,50.55 v1(28,50.55) 28.11,50.44 28.335,50.44 28.8,49.975 R27.2@28.8,48.7 28.812,48.687 28.812,47.462 R25.2@28.825,47.45
OUT_0: P2.7 Q4.3 R54.2 | length 8.1
  Top Layer w0.5: R54.2@33.675,10.275 33.675,6.7 34.275,6.1 35.275,6.1 35.375,6 35.375,5.8 36.269,4.906 36.269,4.076 P2.7@36.47,3.875
OUT_1: P2.5 Q5.3 R55.2 | length 7.9
  Top Layer w0.5: R55.2@37.675,10.275 37.675,6.625 38.207,6.093 39.275,6.093 39.375,5.993 39.375,4.524 39.01,4.159 P2.5@39.01,3.875
OUT_2: P2.3 Q8.3 R70.2 | length 8
  Top Layer w0.5: P2.3@41.55,3.875 41.55,5.2 42.244,5.894 ; R70.2@41.7,10.219 41.7,6.439 42.244,5.894 ; Q8.3@43.4,5.894 42.244,5.894
OUT_3: P2.1 Q9.3 R71.2 | length 8.8
  Top Layer w0.5: P2.1@44.09,3.875 46.115,5.9 46.425,5.9 ; R71.2@45.725,10.2 45.725,6.6 46.27,6.055 46.425,5.9 ; Q9.3@47.425,5.9 46.425,5.9
PRE_CAN1_N: L1.3 U2.12 | length 11
  Top Layer w0.254: L1.3@51.125,24.175 50.955,24.005 50.827,24.005 50.374,24.458 50.183,24.458 50.073,24.348 50.073,24.008 51.541,22.54 58.26,22.54 58.295,22.575 58.682,22.575 U2.12@58.707,22.6
PRE_CAN1_P: L1.2 U2.13 | length 14.9
  Top Layer w0.254: L1.2@53.5,24.175 52.464,24.175 52.114,24.525 52.114,24.77 51.905,24.979 50.165,24.979 49.692,24.506 49.692,23.85 51.383,22.159 58.26,22.159 58.295,22.125 58.682,22.125 U2.13@58.707,22.1
PRE_CAN_N: L3.3 U6.12 | length 7.7
  Top Layer w0.2: U6.12@25.447,40.196 25.499,40.143 25.999,40.143 26.627,39.516 26.627,36.566 27.905,35.288 28.177,35.288 28.965,36.076 L3.3@28.965,36.125
PRE_CAN_P: L3.2 U6.13 | length 7.9
  Top Layer w0.2: U6.13@25.447,39.696 25.482,39.661 26.019,39.661 26.3,39.38 26.3,36.431 27.77,34.961 28.071,34.961 28.442,34.59 28.442,34.447 28.965,33.924 L3.2@28.965,33.75
PRE_VCC: C11.2 C41.2 D6.1 LS1.P Q1.1 Q1.2 Q1.3 Q2.1 Q2.2 Q2.3 R16.2 R50.1 R51.1 R66.1 R67.1 TP2.1 U3.3 U7.3 | length 81.2
  Bottom Layer w0.3: D6.1@22.6,36.69 22.445,36.69 21.9,36.145 21.9,32.6 22.675,31.825 23.7,31.825 ; R67.1@49.025,9.6 49.3,9.6 50.125,10.425 v1(50.125,12.8)
  Bottom Layer w0.5: U7.3@22.593,13.176 22.593,13.751 22.633,13.791 23.201,13.791 23.575,14.165 C41.2@23.575,15.175 LS1.P@25.275,15.175 ; 24.494,32.499 24.602,32.391 C11.2@24.602,27.9 ; C11.2@24.677,27.825 27.1,27.825 U3.3@27.175,27.75 ; C11.2@24.7,27.9 24.7,27.875 25.125,27.45 25.125,15.325 LS1.P@25.275,15.175 ; R50.1@36.975,9.525 36.975,8.05 37.475,7.55 37.475,5.35 ; R51.1@40.975,9.6 40.975,8.05 41.45,7.575 41.45,5.35 ; R66.1@45,9.6 45,8.075 45.48,7.595 45.48,5.35 ; R67.1@49.025,9.6 49.025,7.938 49.475,7.488 49.475,5.825 49,5.35 45.48,5.35 ; LS1.P@25.275,15.175 25.388,15.062 25.388,14.162 34.2,5.35 37.475,5.35 ; 37.475,5.35 41.45,5.35 ; 41.45,5.35 45.48,5.35
R_LED: R41.1 U4.16 | length 43.2
  Top Layer w0.2: v1(11.339,47.775) 11.339,33.861 14.725,30.475 35.375,30.475 37.475,32.575 U4.16@38.4,32.575
REG_EN: D1.1 D2.1 R20.1 TP6.1 U3.2 | length 115.1
  Top Layer w0.3: v1@28.225,29.22 28.225,5.675 33.825,0.075 64.775,0.075 70.675,5.975 70.675,22.025 66.579,26.121 66.579,26.169 66.348,26.4 D2.1@66.075,26.4 ; v1(30.3,31.462) 30.3,38.1 33.275,41.075 33.275,41.425 ; TP6.1@31.6,41.4 33.25,41.4 33.275,41.425 ; D1.1@33.275,44.1 33.275,41.425
  Bottom Layer w0.3: U3.2@27.175,26.8 27.376,27 27.8,27 28.25,27.45 v1(28.25,29.225) ; R20.1@28.25,29.275 v1(28.25,29.225) ; v1(30.3,31.462) 28.475,29.636 28.475,29.45 v1(28.25,29.225)
RESETN: C45.1 J3.10 R21.2 R45.1 R48.2 | length 32.2
  Top Layer w0.3: v1(33.3,47.3) 34.5,46.1 ; R21.2@33.475,31.462 31.939,31.462 30.875,32.525 30.875,37.875 34.5,41.5 34.5,46.1 ; v1(42.94,46.05) 42.94,46.425 42.765,46.6 35,46.6 34.5,46.1
  Bottom Layer w0.3: C45.1@32,49.75 32.028,49.722 32.528,49.722 33.082,49.168 33.082,48.768 R48.2@33.3,48.55 v1(33.3,47.3)
RP_MOS_LINK: D6.2 Q1.4 Q2.4 R15.1 | length 20.4
  Bottom Layer w0.2: D6.2@22.6,39.96 26.965,39.96 29.875,37.05 29.875,37 30.15,36.725 R15.1@30.2,36.725 30.025,36.55 30.025,33.425 29.85,33.25 27.025,33.25 26.894,33.119 26.894,32.824 Q2.4@26.819,32.749 26.819,32.824 26.744,32.899 26.669,32.899 26.318,33.25 23.236,33.25 23.094,33.108 23.094,32.824 Q1.4@23.019,32.749
SD_CLK: R1.1 SD1.5 U4.78 | length 21.1
  Top Layer w0.2: U4.78@50.975,41.65 50.975,40.738 50.425,40.188 50.425,36.5 50.925,36 v1(51,36)
  Bottom Layer w0.2: v1(51,36) 50.475,36.525 50.475,36.932 50.818,37.275 63.348,37.275 63.55,37.073 63.6,37.073 63.875,36.798 v1(63.875,36.748)
SD_CMD: R2.1 R32.1 SD1.3 U4.80 | length 30.1
  Top Layer w0.2: v1(49.975,43.025) U4.80@49.975,41.65 49.975,41.079 49.575,40.679 49.575,35.925 v1(51,34.5) ; v1(62.3,36.5) 62.3,35.55 63.002,34.848 63.575,34.848 v1(63.875,34.548)
  Bottom Layer w0.2: v1(49.975,43.025) 50.475,42.525 51.838,42.525 53.6,40.763 R32.1@53.6,40.688 ; v1(51,34.5) 51.6,35.1 51.6,36.125 52,36.525 60.575,36.525 61.175,35.925 61.725,35.925 v1(62.3,36.5)
SD_CS: SD1.2 U4.77 | length 20.1
  Top Layer w0.2: v1(51,36.75) 51,40.125 51.475,40.6 U4.77@51.475,41.65 ; v1(61.425,36.5) 61.425,35.425 63.102,33.748 63.575,33.748 SD1.2@63.875,33.448
  Bottom Layer w0.2: v1(51,36.75) 51.081,36.75 51.231,36.9 61.025,36.9 v1(61.425,36.5)
SD_DAT0: R3.1 R6.1 SD1.7 U4.79 | length 28.7
  Top Layer w0.2: v1(51,35.25) 50.025,36.225 50.025,40.425 50.475,40.875 U4.79@50.475,41.65 50.477,41.653 50.477,42.652 50.575,42.75 50.836,43.011 51.186,43.011 v1(51.2,43.025)
  Bottom Layer w0.2: v1(51,35.25) 49.975,36.275 49.975,37.25 50.4,37.675 62.602,37.675 63.55,38.623 63.6,38.623 63.875,38.898 v1(63.875,38.948) ; v1(51.2,43.025) 52.075,43.025 53.067,42.033 53.58,42.033 R6.1@53.6,42.013
SD_DAT_PULL_UP: R5.1 SD1.1 SD1.8 | length 10.1
  Top Layer w0.3: v1(63.875,32.348) 64.002,32.475 65.075,32.475 65.5,32.9 65.5,39.173 64.625,40.048 SD1.8@63.875,40.048
SPI1_MISO: U4.30 U5.15 | length 5.5
  Top Layer w0.2: U4.30@41.975,26.5 41.975,24.9 43.4,23.475 43.4,22.675 43.154,22.429 42.454,22.429 U5.15@42.425,22.4
SPI1_MOSI: U4.31 U5.14 | length 6.4
  Top Layer w0.2: U5.14@42.425,21.75 43.35,21.75 43.8,22.2 43.8,23.725 42.475,25.05 U4.31@42.475,26.5
SPI1_nCS: U4.28 U5.1 | length 6.7
  Top Layer w0.2: U5.1@36.825,23.05 39.475,23.05 40.975,24.55 U4.28@40.975,26.5
SPI1_SCLK: U4.29 U5.16 | length 4.1
  Top Layer w0.2: U4.29@41.475,26.5 41.475,23.533 41.825,23.183 41.825,23.166 41.941,23.05 U5.16@42.425,23.05
SPI4_MISO: U4.4 U6.6 | length 17.9
  Top Layer w0.2: v1(27.75,44) 27.75,43.919 27.6,43.769 27.6,42 27.886,41.714 28.515,41.714 U6.6@28.533,41.696 ; v1(36.5,43) 36.5,39.725 37.648,38.577 38.397,38.577 U4.4@38.4,38.575
  Bottom Layer w0.2: v1(27.75,44) 35.5,44 v1(36.5,43)
SPI4_MOSI: U4.5 U6.11 | length 21
  Top Layer w0.2: U6.11@25.447,40.696 25.499,40.748 25.962,40.748 26.225,41.012 26.225,43.25 25.801,43.674 25.801,43.949 v1(25.75,44) ; v1(35.75,43) 35.75,39.9 37.575,38.075 U4.5@38.4,38.075
  Bottom Layer w0.2: v1(25.75,44) 26.25,43.5 35.2,43.5 35.7,43 v1(35.75,43)
SPI4_nCS: U4.3 U6.14 | length 36.2
  Top Layer w0.2: v1(37.25,46) 37.25,39.547 37.72,39.077 38.397,39.077 U4.3@38.4,39.075
  Top Layer w0.3: v1(22.95,45) 22.95,42.7 20.825,40.575 20.825,38.375 21.325,37.875 24.4,37.875 25.108,38.583 25.108,39.193 25.11,39.196 U6.14@25.447,39.196
  Bottom Layer w0.2: v1(22.95,45) 23.45,44.5 25.75,44.5 27.25,46 v1(37.25,46)
SPI4_SCLK: U4.1 U6.8 | length 22.9
  Top Layer w0.2: v1(25.25,45) 25.25,42.249 25.302,42.196 U6.8@25.447,42.196 ; v1(38,46) 38,40.081 38.006,40.075 U4.1@38.4,40.075
  Bottom Layer w0.2: v1(25.25,45) 26.75,46.5 37.5,46.5 v1(38,46)
SWCLK: J3.4 R82.2 U4.76 | length 13.1
  Top Layer w0.2: v1(46.75,46.05) 46.975,45.825 46.975,44.625 47.625,43.975 51.15,43.975 51.975,43.15 U4.76@51.975,41.65
  Bottom Layer w0.2: v1(46.75,46.05) 46.975,46.275 46.975,47.55 47.45,48.025 48.275,48.025 48.725,48.475 48.725,48.775 49,49.05 R82.2@49.05,49.05
SWDIO: J3.2 U4.72 | length 13.4
  Top Layer w0.2: v1(48.02,46.05) 48.043,46.027 48.043,44.482 48.223,44.302 51.285,44.302 55.075,40.512 55.075,39.175 54.475,38.575 U4.72@53.55,38.575
SWO: J3.6 U4.89 | length 4.4
  Top Layer w0.2: U4.89@45.475,41.65 45.475,46.045 v1(45.48,46.05)
TRIG_0: R60.1 U4.38 | length 27.4
  Top Layer w0.2: v1(36.625,6.85) 36.625,6.931 36.9,7.206 36.9,11.55 38.05,12.7 44.738,12.7 45.975,13.937 U4.38@45.975,26.5
TRIG_1: R61.1 U4.39 | length 23.9
  Top Layer w0.2: v1(40.625,6.85) 40.627,6.852 40.627,11.152 41.825,12.35 45.025,12.35 46.475,13.8 U4.39@46.475,26.5
TRIG_2: R76.1 U4.40 | length 20.6
  Top Layer w0.2: v1(44.65,6.844) 44.652,6.846 44.652,11.347 46.975,13.67 U4.40@46.975,26.5
TRIG_3: R77.1 U4.41 | length 20.1
  Top Layer w0.2: U4.41@47.475,26.5 47.475,13.65 48.677,12.448 48.677,6.852 v1(48.675,6.85)
VCC_SENSE: R16.1 R18.1 U5.9 | length 14
  Top Layer w0.3: U5.9@42.425,18.5 43.746,18.5 43.996,18.25 v1(44.05,18.25)
  Bottom Layer w0.3: R18.1@40.6,19.75 40.6,19.725 40.825,19.5 41.1,19.5 42.275,18.325 42.275,18.25 ; 42.325,18.25 v1(44.05,18.25) 46.925,18.25 50.125,15.05 R16.1@50.125,14.25
VDDA: C29.1 C30.2 C37.1 C38.2 FB1.2 U4.20 U4.21 | length 10.2
  Top Layer w0.3: U4.21@38.4,30.075 39.577,30.075 v1(40.077,29.575) ; U4.20@38.4,30.575 39.562,30.575 v1(40.09,31.104)
  Bottom Layer w0.3: v1(40.077,29.575) 40.104,29.602 41.425,29.602 C29.1@41.452,29.629 41.506,29.575 FB1.2@42.752,29.575 ; C38.2@40.084,31.097 v1(40.09,31.104) 40.131,31.062 41.413,31.062 C37.1@41.413,31.041 ; C37.1@41.454,31.021 41.49,30.986 42.065,30.986 42.802,30.248 FB1.2@42.802,29.575
X32_N: C47.1 U4.9 Y2.2 | length 4.7
  Top Layer w0.2: v1(34.655,37.69) 34.712,37.747 34.906,37.747 35.221,38.062 35.386,38.062 35.399,38.049 35.642,37.806 37.286,36.161 37.738,36.161 37.825,36.075 U4.9@38.4,36.075
X32_P: C46.1 U4.8 Y2.1 | length 4.9
  Top Layer w0.2: v1(34.655,39.09) 34.721,39.09 34.973,38.838 34.973,38.767 35.125,38.615 35.196,38.615 35.422,38.389 35.522,38.389 35.535,38.376 35.969,37.941 37.422,36.488 37.738,36.488 37.825,36.575 U4.8@38.4,36.575
X_N: C43.2 U4.13 Y1.1 | length 6
  Top Layer w0.2: v1(32.775,33.287) 32.9,33.287 33.775,34.161 37.738,34.161 37.825,34.075 U4.13@38.4,34.075
X_P: C42.2 U4.12 Y1.3 | length 3.6
  Top Layer w0.2: v1(35.075,35.037) 35.2,35.037 35.625,34.612 35.625,34.606 35.742,34.488 37.738,34.488 37.825,34.575 U4.12@38.4,34.575
pads on no net: J1. J1.2 J1.5 J2. J2.2 J2.5 J3.7 J3.8 J3.9 P1.5 U1.3 U1.10 U4.2 U4.7 U4.17 U4.18 U4.22 U4.23 U4.24 U4.32 U4.33 U4.34 U4.35 U4.36 U4.37 U4.42 U4.43 U4.44 U4.45 U4.46 U4.47 U4.55 U4.56 U4.57 U4.58 U4.61 U4.62 U4.63 U4.64 U4.65 U4.66 U4.67 U4.68 U4.69 U4.70 U4.71 U4.81 U4.82 U4.83 U4.84 U4.85 U4.86 U4.87 U4.88 U4.90 U4.91 U4.92 U4.93 U4.97 U4.98

## Polygon pours and split planes (outlines as drawn)
GND on Bottom Layer "GND_L02_P007" (solid, remove dead copper, pour order 7): 0,2 0,52 cw(c3,52) 3,55 72,55 cw(c72,52) 75,52 75,2 cw(c72,2) 72,-1 3,-1 cw(c3,2)
NetF1_2 on Bottom Layer "NETF1_2_L02_P005" (solid, pour order 5): 24.319,38.352 27.469,38.352 27.469,36.392 29.019,35.499 29.019,33.519 22.769,33.519 22.769,35.499 24.319,36.392
INT_3V3 on Bottom Layer "INT_3V3_L02_P003" (solid, pour order 3): 34.497,23.177 34.497,21.923 35.953,21.923 38.272,23.948 39.727,23.95 39.728,23.948 39.728,25.203 37.325,29.65 35.725,29.65
PRE_VCC on Bottom Layer "PRE_VCC_L02_P002" (solid, pour order 2): 23.494,32.999 25.144,32.999 25.144,32.499 25.443,32.2 26.995,32.2 27.294,32.499 27.294,32.999 28.944,32.999 28.948,31.65 23.494,31.65
NetC10_2 on Bottom Layer "NETC10_2_L02_P000" (solid, pour order 0): 28.874,27.15 29.874,27.15 31.025,29.65 32.625,29.65 32.625,23.95 31.025,23.95 29.874,26.45 28.874,26.45
GND on Top Layer "GND_L01_P008" (solid, remove dead copper, pour order 8): 0,2 0,52 cw(c3,52) 3,55 72,55 cw(c72,52) 75,52 75,2 cw(c72,2) 72,-1 3,-1 cw(c3,2)
NetC25_1 on Top Layer "NETC25_1_L01_P006" (solid, pour order 6): 21.605,35.277 22.609,35.944 23.471,35.944 23.471,34.039 22.609,34.039 21.605,34.757
NetC7_1 on Top Layer "NETC7_1_L01_P004" (solid, pour order 4): 51.99,16.615 51.99,17.135 51.298,17.919 51.298,18.781 53.202,18.781 53.202,17.919 52.51,17.135 52.51,16.615

## Other copper
Top Layer:
  pour cut-out: 30.875,37.875 34.5,41.5 34.5,46.1 35,46.6 37.225,46.6 37.25,46.575 37.25,38.547 37.782,38.015 37.782,35.228 37.828,35.181 37.738,35.091 37.738,33.963 35.237,31.462 31.939,31.462 30.875,32.525
Bottom Layer:
  pour cut-out: 31.5,32 38.5,32 38.5,38.981 36.481,41 31.5,41

## Silkscreen, mask and mechanical layers (free items; w line width, h text height)
Top Overlay:
  drawing of 29 lines, arcs and shapes, not listed
  text "PWR" at 7,52.075 h0.75
  text "MCU" at 11,52.075 h0.75
  text "CAN0" at 14.625,52.075 h0.75
  text "CAN1" at 18.75,52.075 h0.75
  text "SD" at 23.375,52.075 h0.75
  text "WAKE" at 26.625,52.075 h0.75
  text "RST" at 31,52.075 h0.75
  text "BOOT" at 34.625,52.075 h0.75
  text "DEBUG" at 39.075,52.075 h0.75
  text "CAN0" at 15.125,45.275 h0.75
  text "MCU" at 38.825,43.125 h0.75
  text "SD CARD" at 62.725,42.675 h0.75
  text "INH" at 32.255,42.113 h0.5
  text "EN" at 32.404,41.008 h0.5
  text "VCAP" at 55.984,39 h0.5
  text "JLCJLCJLCJLC" at 0.75,37.925 h1
  text "4 2 0  GND" at 31.35,26.1 h0.75
  text "INH" at 58.667,26.038 h0.5
  text "3 1 NC GND" at 31.475,24.675 h0.75
  text "VCAP" at 47.584,22.7 h0.5
  text "CAN1" at 56.9,18.35 h0.75
  text "IN" at 33.4,16.125 h0.75
  text "VCC" at 50.759,12.438 h0.5
  text "5V0" at 50.759,11.388 h0.5
  text "3V3" at 50.759,10.338 h0.5
  text "0 1 2 3" at 29.475,3.5 h0.75
  text "OUT" at 45.775,2.775 h0.75 r270
  text "CANLink V2" at 48.8,1 h2
  text "GND" at 29.475,0.95 h0.75
  text "GND" at 32.35,0.95 h0.75
Mechanical 1:
  the board outline again, w0.1

## Text inside footprints (layer, text, board x,y; h text height)
U2: Top 3D Body "*" at 61.241,22.3 h1.27 r180; Top Overlay "*" at 62.365,21.422 h1.27 r180
U6: Top 3D Body "*" at 27.981,39.896 h1.27 r180; Top Overlay "*" at 29.105,39.018 h1.27 r180